# Altium PCB UU006_UUDisplay.PcbDoc
Units mm, origin at the board's own origin, x right, y up, seen from the top; angles counter-clockwise.
Board outline 80 x 50 mm, 2 copper layers (Top Layer, Bottom Layer), stack 1.413 mm thick; 94 components, 55 nets, 292 pads, 59 vias.
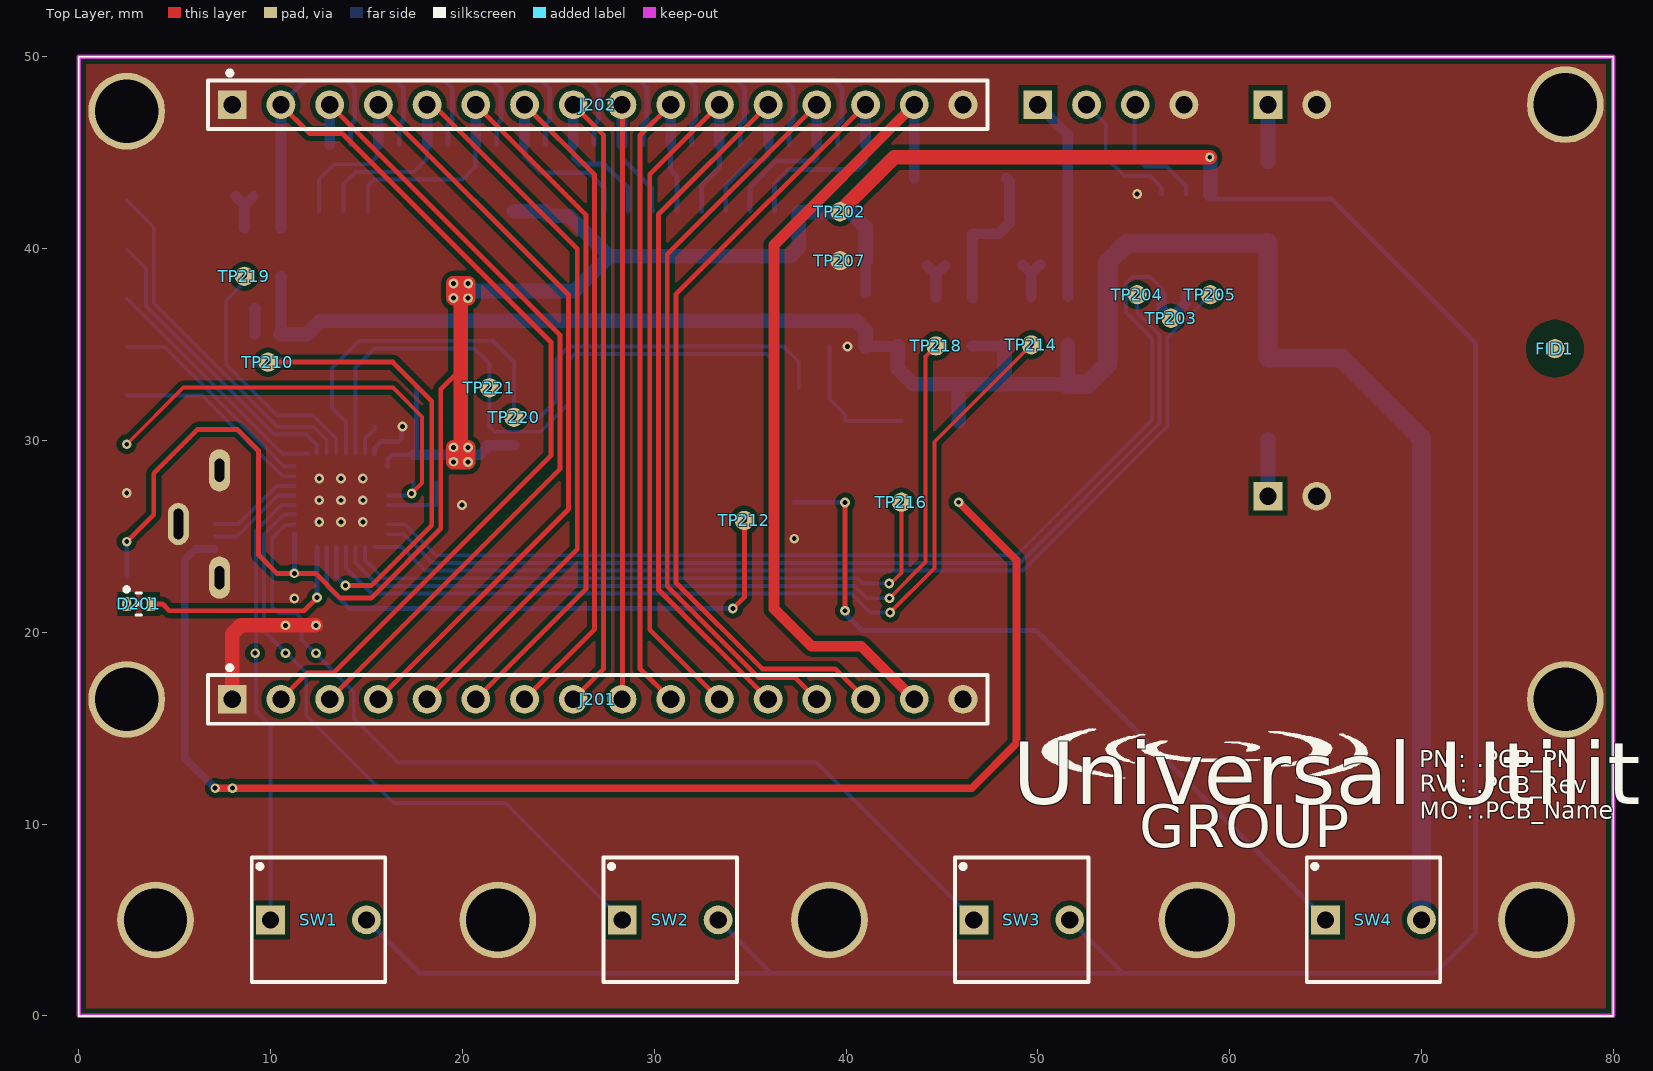
[diagram p0: Top Layer view]
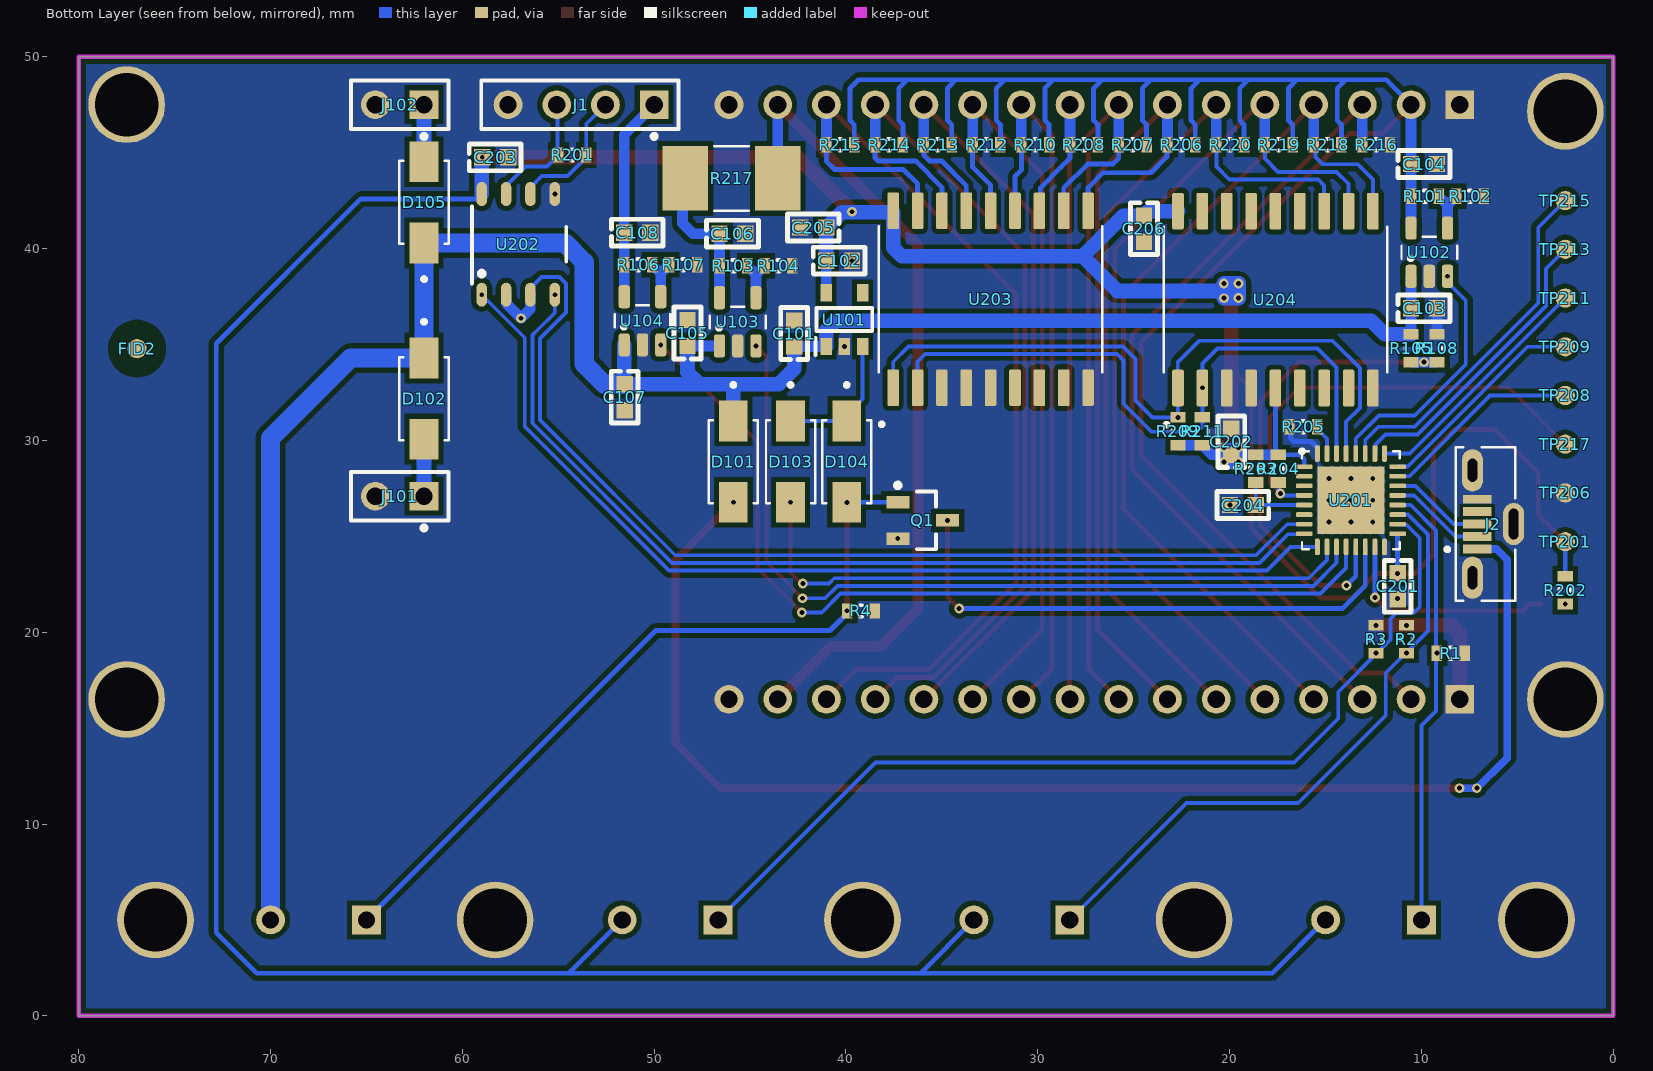
[diagram p1: Bottom Layer view, seen from below]
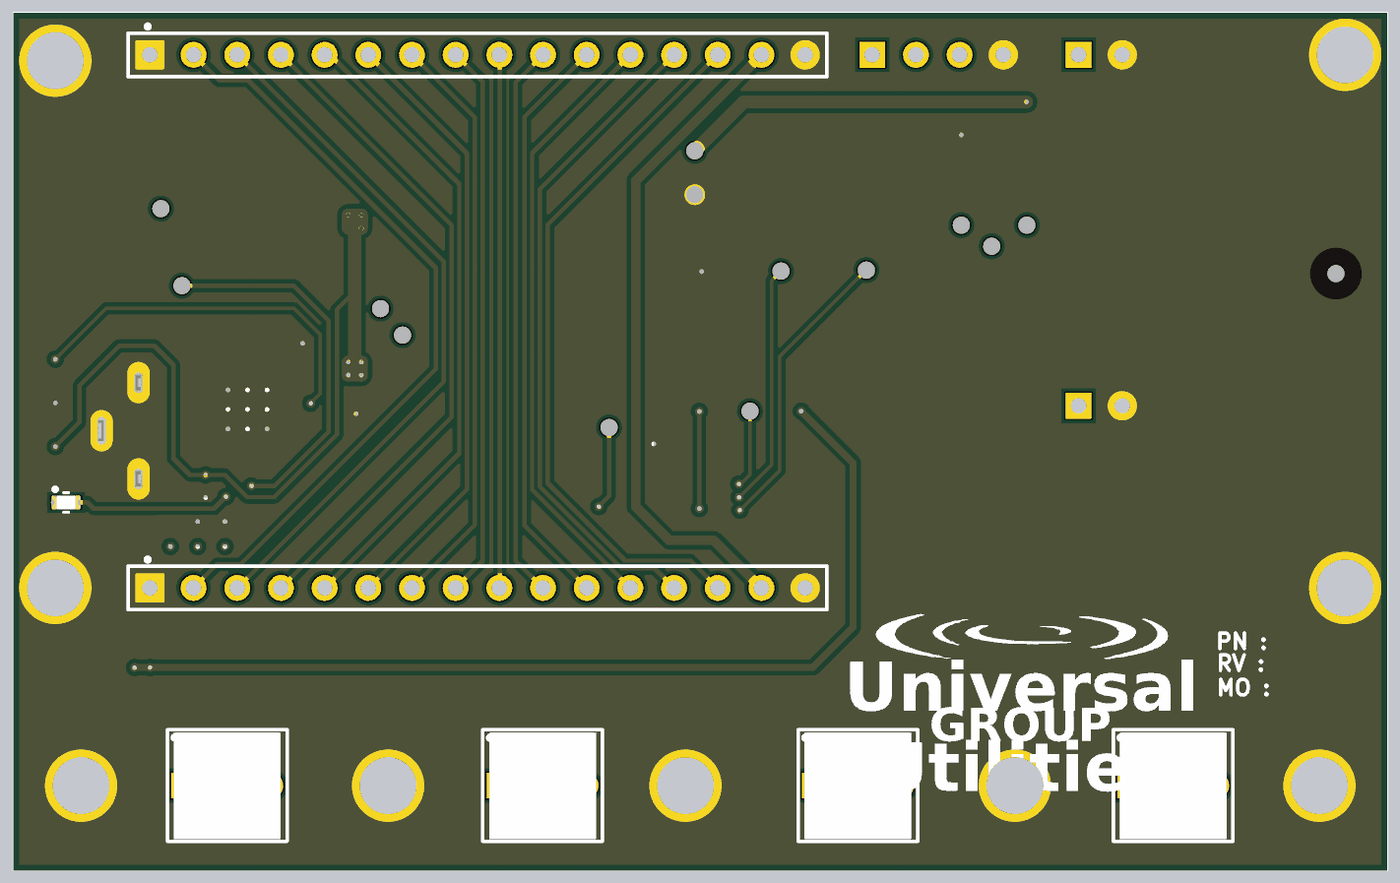
[diagram p2: 3D render of the assembled board from above, using the file's embedded part models]
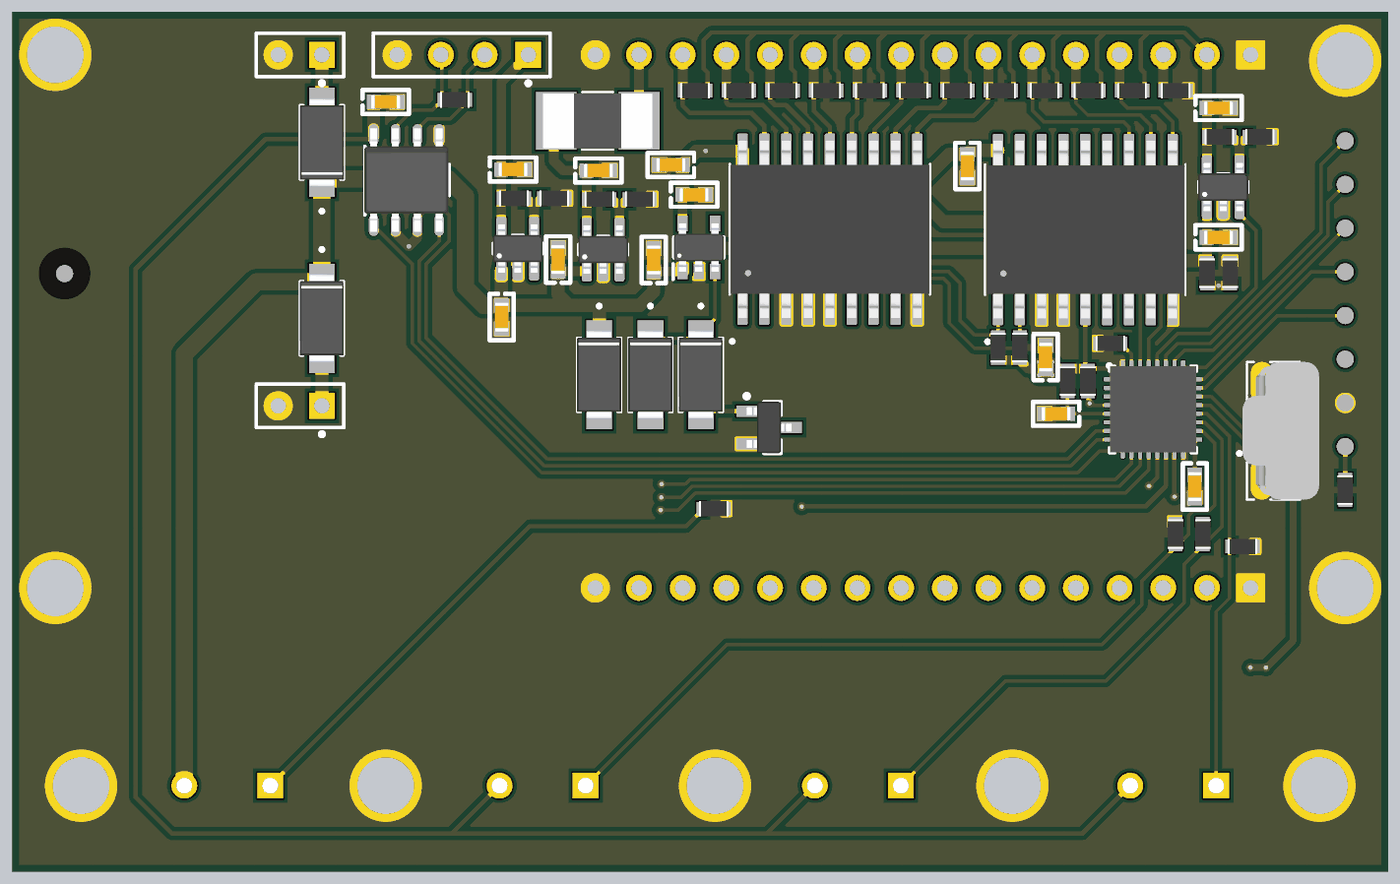
[diagram p3: 3D render of the assembled board from below, using the file's embedded part models]

## Layer stack, top to bottom
Top Solder: solder mask 0.0254, Solder Resist, Dk 3.5
Top Layer: signal copper 0.0356
Dielectric 1: prepreg 0.0711, PP-006, Dk 4.1
Core: core 1.2, FR-4, Dk 3.95
Dielectric 2: prepreg 0.0711, PP-006, Dk 4.1
Bottom Layer: signal copper 0.0356
Bottom Solder: solder mask 0.0254, Solder Resist, Dk 3.5

## Board outline
0,0 0,50 80,50 80,0

## Design rules (kind name [scope] priority, off if disabled: settings)
Clearance Clearance_FID [HasPad('FID*')] p1: gap=1 ignorepadtopadclearanceinfootprint=FALSE except(0: Arc-Hole Track-Hole SMDPad-Hole THPad-Hole Via-Hole Fill-Hole Poly-Hole Region-Hole Text-Hole)
Clearance Clearance_USB [HasPad('J2-*')] p2: gap=0.15 ignorepadtopadclearanceinfootprint=FALSE
Clearance Clearance_Polygon [InNamedPolygon('DGND')] p3: gap=0.254 ignorepadtopadclearanceinfootprint=FALSE
Clearance Clearance_IC [HasPad('C*') or  HasPad('U*') or HasPad('J*')] p4: gap=0.2 ignorepadtopadclearanceinfootprint=FALSE
Clearance Clearance_GND [InNet('DGND')] p5: gap=0.254 ignorepadtopadclearanceinfootprint=FALSE except(0: Arc-Hole Track-Hole SMDPad-Hole THPad-Hole Via-Hole Fill-Hole Poly-Hole Region-Hole Text-Hole)
Clearance [All] p6: gap=0.2 ignorepadtopadclearanceinfootprint=FALSE
DiffPairsRouting DiffPairsRouting_1 [All] p2: maxlimit=0.254 minlimit=0.254 mostfreqgap=0.254 toplayer_minwidth=0.381 toplayer_maxwidth=0.381 toplayer_prefwidth=0.381 bottomlayer_minwidth=0.381 bottomlayer_maxwidth=0.381 bottomlayer_prefwidth=0.381 maxuncoupledlength=12.7
FanoutControl Fanout_LCC [IsLCC] p1: bgadir=Out bgaviamode=Centered fanoutstyle=Auto fanoutdirection=Alternating viagrid=0.025 // Fanout_LCC (Default Rule)
FanoutControl Fanout_SOIC [IsSOIC] p2: bgadir=Out bgaviamode=Centered fanoutstyle=Auto fanoutdirection=Alternating viagrid=0.025 // Fanout_SOIC (Default Rule)
FanoutControl Fanout_BGA [IsBGA] p3: bgadir=Out bgaviamode=Centered fanoutstyle=Auto fanoutdirection=Alternating viagrid=0.025 // Fanout_BGA (Default Rule)
FanoutControl Fanout_Default [All] p4: bgadir=Out bgaviamode=Centered fanoutstyle=Auto fanoutdirection=Alternating viagrid=0.025 // Fanout_Default (Default Rule)
FanoutControl Fanout_Small [(CompPinCount < 5)] p5: bgadir=Out bgaviamode=Centered fanoutstyle=Auto fanoutdirection=OutThenIn viagrid=0.025 // Fanout_Small (Default Rule)
HoleToHoleClearance [All] p1: gap=0.25 allowstackedmicrovias=TRUE
MinimumAnnularRing [All] p1: minimumring=0.05
MinimumSolderMaskSliver [All] p1: minsoldermaskwidth=0.05
PasteMaskExpansion PasteMaskExpansion_1 [All] p2: expansion=0
PolygonConnect [All] p1: connectstyle=Direct reliefconductorwidth=0.254 reliefentries=4 polygonreliefangle="90 Angle" airgapwidth=0.254
RoutingVias [All] p1: holewidth=0.711 width=1.27 viastyle="Through Hole" minholewidth=0.15 minwidth=0.3 maxholewidth=0.711 maxwidth=1.27
SilkToBoardRegionClearance SilkToBoardRegionClearance_3 [All] p2:
SilkToBoardRegionClearance SilkToBoardRegionClearance_2 [All] p3:
SilkToBoardRegionClearance SilkToBoardRegionClearance_1 [All] p4:
SilkToSolderMaskClearance [IsPad] p1: minsilkscreentomaskgap=0.12 clearancetoexposedcopper=TRUE
SolderMaskExpansion [All] p1: expansion=0.102 istentingtop=FALSE
SolderMaskExpansion SolderMaskExpansion_1 [All] p2: expansion=0.102 istentingtop=FALSE
Width [All] p1: maxlimit=5.56 minlimit=0.2 preferedwidth=0.254
22 further rules are at their usual default settings.

## Classes and differential pairs
component class MainControl: 3 C201 C202 C203 C204 C205 C206 D201 J201 J202 R201 R202 R203 R204 R205 R206 R207 R208 R209 R210 R211 R212 R213 R214 R215 R216 R217 R218 R219 R220 TP201 TP202 TP203 TP204 TP205 TP206 TP207 TP208 TP209 TP210 TP211 TP212 TP213 TP214 TP215 TP216 TP217 TP218 TP219 TP220 TP221 U201 U202 U203 U204
component class 0_Overview: FID1 FID2 J1 J2 PCB1 Q1 R1 R2 R3 R4 SW1 SW2 SW3 SW4
component class PowerSystem: C101 C102 C103 C104 C105 C106 C107 C108 D101 D102 D103 D104 D105 J101 J102 R101 R102 R103 R104 R105 R106 R107 R108 U101 U102 U103 U104

## Components (designator, comment, footprint, x,y, rotation, side; value= is the part's Value field where it differs from the comment)
C101 "0.1uF" C_0603 42.704,35.572 r90 bottom
C102 "0.1uF" C_0603 40.358,39.367 r180 bottom
C103 "0.1uF" C_0603 9.865,36.885 r180 bottom
C104 "0.1uF" C_0603 9.865,44.406 r180 bottom
C105 "0.1uF" C_0603 48.265,35.598 r90 bottom
C106 "0.1uF" C_0603 45.92,40.774 r180 bottom
C107 "0.1uF" C_0603 51.54,32.251 r270 bottom
C108 "0.1uF" C_0603 50.885,40.83 r180 bottom
C201 "0.1uF" C_0603 11.241,22.393 r270 bottom
C202 "0.1uF" C_0603 19.911,29.929 r90 bottom
C203 "0.1uF" C_0603 58.29,44.76 r180 bottom
C204 "0.1uF" C_0603 19.31,26.63 r0 bottom
C205 "0.1uF" C_0603 41.708,41.097 r0 bottom
C206 "0.1uF" C_0603 24.468,41.036 r270 bottom
D101 "SK310A R2" DIOM4325X250N 45.874,28.891 r270 bottom
D102 "SK310A R2" DIOM4325X250N 62,32.179 r270 bottom
D103 "SK310A R2" DIOM4325X250N 42.892,28.891 r270 bottom
D104 "SK310A R2" DIOM4325X250N 39.962,28.891 r270 bottom
D105 "SK310A R2" DIOM4325X250N 62,42.409 r90 bottom
D201 "150060VS75000" LED_0VS75000_WRE 3.129,21.47 r0 top
FID1 "FIDUCIAL" FID 76.96,34.78 r0 top value="Non SE"
FID2 "FIDUCIAL" FID 76.96,34.78 r90 bottom value="Non SE"
J1 "*" CON_4P_Header 50,47.5 r0 bottom
J2 "1051330011" MOLEX_105133-0011 7.34,25.64 r90 bottom
J101 "796866-2" CON_2P_Header 62,27.089 r0 bottom
J102 "796866-2" CON_2P_Header 62,47.5 r0 bottom
J201 "*" CON_16P_Header 8,16.5 r0 top
J202 "*" CON_16P_Header 8,47.5 r0 top
Q1 "RK7002BMT116" SOT95P245X110-3M 36,25.826 r180 bottom
R1 "4.7k" R_0603 8.47,18.907 r180 bottom
R2 "4.7k" R_0603 10.78,19.632 r90 bottom
R3 "4.7k" R_0603 12.365,19.632 r90 bottom
R4 "4.7k" R_0603 39.218,21.108 r180 bottom
R101 "4.7k" R_0603 9.815,42.736 r180 bottom
R102 "4.7k" R_0603 7.465,42.736 r180 bottom
R103 "4.7k" R_0603 45.87,39.103 r180 bottom
R104 "4.7k" R_0603 43.52,39.103 r180 bottom
R105 "150k" R_0603 10.54,34.802 r270 bottom
R106 "4.7k" R_0603 50.835,39.16 r180 bottom
R107 "4.7k" R_0603 48.485,39.16 r180 bottom
R108 "150k" R_0603 9.19,34.802 r90 bottom
R201 "120R" R_0603 54.27,44.88 r180 bottom
R202 "220R" R_0603 2.5,22.195 r90 bottom
R203 "0" R_0603 18.635,28.529 r270 bottom
R204 "4.7k" R_0603 17.46,28.529 r90 bottom
R205 "0" R_0603 16.157,30.718 r180 bottom
R206 "4.7k" R_0603 22.515,45.41 r0 bottom
R207 "4.7k" R_0603 25.055,45.41 r0 bottom
R208 "4.7k" R_0603 27.595,45.41 r0 bottom
R209 "4.7k" R_0603 22.691,30.475 r90 bottom
R210 "4.7k" R_0603 30.135,45.41 r0 bottom
R211 "4.7k" R_0603 21.421,30.475 r90 bottom
R212 "4.7k" R_0603 32.675,45.41 r0 bottom
R213 "4.7k" R_0603 35.215,45.41 r0 bottom
R214 "4.7k" R_0603 37.755,45.41 r0 bottom
R215 "4.7k" R_0603 40.295,45.41 r0 bottom
R216 "4.7k" R_0603 12.355,45.41 r0 bottom
R217 "3R3" R_2512 45.965,43.66 r180 bottom
R218 "4.7k" R_0603 14.895,45.41 r0 bottom
R219 "4.7k" R_0603 17.435,45.41 r0 bottom
R220 "4.7k" R_0603 19.975,45.41 r0 bottom
SW1 "TC-0308-X-ROHS" Tactile 10,5 r0 top
SW2 "TC-0308-X-ROHS" Tactile 28.333,5 r0 top
SW3 "TC-0308-X-ROHS" Tactile 46.667,5 r0 top
SW4 "TC-0308-X-ROHS" Tactile 65,5 r0 top
TP201 "" TP_Testpoint 2.5,24.72 r270 bottom
TP202 "" TP_Testpoint 39.683,41.92 r90 top
TP203 "" TP_Testpoint 56.946,36.367 r270 top
TP204 "" TP_Testpoint 55.18,37.594 r270 top
TP205 "" TP_Testpoint 58.99,37.594 r270 top
TP206 "" TP_Testpoint 2.5,27.26 r270 bottom
TP207 "" TP_Testpoint 39.683,39.367 r90 top
TP208 "" TP_Testpoint 2.5,32.34 r180 bottom
TP209 "" TP_Testpoint 2.5,34.88 r180 bottom
TP210 "" TP_Testpoint 9.865,34.077 r270 top
TP211 "" TP_Testpoint 2.5,37.42 r180 bottom
TP212 "" TP_Testpoint 34.7,25.826 r270 top
TP213 "" TP_Testpoint 2.5,39.96 r270 bottom
TP214 "" TP_Testpoint 49.66,34.98 r270 top
TP215 "" TP_Testpoint 2.5,42.5 r180 bottom
TP216 "" TP_Testpoint 42.892,26.776 r270 top
TP217 "" TP_Testpoint 2.5,29.8 r180 bottom
TP218 "" TP_Testpoint 44.695,34.923 r270 top
TP219 "" TP_Testpoint 8.64,38.555 r270 top
TP220 "" TP_Testpoint 22.691,31.2 r270 top
TP221 "" TP_Testpoint 21.41,32.741 r270 top
U101 "BU33SD5WG-TR" SOT95P280X125-5N 40.083,36.297 r90 bottom
U102 "ZTP7001-00" SOT95P280X145-5N 9.59,39.81 r90 bottom
U103 "ZTP7001-00" SOT95P280X145-5N 45.645,36.178 r90 bottom
U104 "ZTP7001-00" SOT95P280X145-5N 50.61,36.235 r90 bottom
U201 "STM32L432KCU6" QFN50P500X500X60-33N 13.676,26.88 r180 bottom
U202 "SN65HVD11DR" D0008A_L 57.085,40.219 r90 bottom
U203 "MCP23008-E/SO" SOIC127P1030X265-18N 32.459,37.358 r90 bottom
U204 "MCP23008-E/SO" SOIC127P1030X265-18N 17.611,37.339 r90 bottom

## Footprints (in the part's own frame and the unit in brackets; to place one, negate y for a bottom-side part, rotate by r counter-clockwise, add the part's x,y. Pads: shape width x height; smd on the part's side, far side on the other; paste and mask are expansions set on the pad)
C_0603 [mm] "Chip Capacitor, 2-Leads, Body 1.60x0.75mm, IPC Medium Density"
  rect 0.85x0.85 smd mask+0.03: 1(-0.675,0) 2(0.675,0)
  silkscreen extent -1.35,-0.7 1.35,0.7, body extent -0.85,-0.4 0.85,0.4, height 0.8
CON_2P_Header [mm] "Connector; Header; 2 Position"
  rect 1.5x1.5 hole 0.9: 1(0,0)
  round 1.5 hole 0.9: 2(2.54,0)
  silkscreen extent -1.27,-1.27 3.81,1.76
CON_4P_Header [mm] "Connector; Header 4 Position"
  rect 1.5x1.5 hole 0.9: 1(0,0)
  round 1.5 hole 0.9: 2(2.54,0) 3(5.08,0) 4(7.62,0)
  silkscreen extent -1.27,-1.27 9.02,1.76
CON_16P_Header [mm] "Connector; Header 16 Position"
  rect 1.5x1.5 hole 0.9: 1(0,0)
  round 1.5 hole 0.9: 2(2.54,0) 3(5.08,0) 4(7.62,0) 5(10.16,0) 6(12.7,0) 7(15.24,0) 8(17.78,0) 9(20.32,0) 10(22.86,0) 11(25.4,0) 12(27.94,0) 13(30.48,0) 14(33.02,0) 15(35.56,0) 16(38.1,0)
  silkscreen extent -1.27,-1.27 39.37,1.76
D0008A_L [mm]
  oval 1.25x0.55 smd mask+0.05: 1(-2.625,1.905) 2(-2.625,0.635) 3(-2.625,-0.635) 4(-2.625,-1.905) 5(2.625,-1.905) 6(2.625,-0.635) 7(2.625,0.635) 8(2.625,1.905)
  silkscreen extent -2.03,-2.5 1.97,2.41, body extent -3.01,-2.45 3.01,2.45, height 1.63
DIOM4325X250N [mm]
  rect 2.12x1.5 smd: 1(-2.115,0) 2(2.115,0)
  silkscreen extent -4.1,-1.28 2.16,1.28, body extent -2.58,-1.29 2.56,1.27, height 2.5
FID [mm]
  round 1 smd mask+1: ""(0,0)
LED_0VS75000_WRE [mil]
  rect 17.5x28 smd: 1(-24.75,0) 2(24.75,0)
  silkscreen extent -29,-22 6,34, body extent -31,-16 32,16, height 28
MOLEX_105133-0011 [mm]
  rect 0.45x1.5 smd mask+0.05: 1(-1.3,-0.25) 2(-0.65,-0.25) 3(0,-0.25) 4(0.65,-0.25) 5(1.3,-0.25)
  oval 2.2x1.1 hole 0.5 slot 1.2 at 0 deg: S1(-2.8,0) S2(2.8,0)
  oval 2.2x1.1 hole 0.5 slot 1.6 at 0 deg: S3(0,-2.15)
  silkscreen extent -4,-2.22 4,1.41, body extent -4.03,-3.32 4,1.13, height 7.53
QFN50P500X500X60-33N [mm]
  rrect54% 0.86x0.25 smd mask+0.05: 1(-2.435,1.75) 2(-2.435,1.25) 3(-2.435,0.75) 4(-2.435,0.25) 5(-2.435,-0.25) 6(-2.435,-0.75) 7(-2.435,-1.25) 8(-2.435,-1.75) 17(2.435,-1.75) 18(2.435,-1.25) 19(2.435,-0.75) 20(2.435,-0.25) 21(2.435,0.25) 22(2.435,0.75) 23(2.435,1.25) 24(2.435,1.75)
  rrect54% 0.25x0.86 smd mask+0.05: 9(-1.75,-2.435) 10(-1.25,-2.435) 11(-0.75,-2.435) 12(-0.25,-2.435) 13(0.25,-2.435) 14(0.75,-2.435) 15(1.25,-2.435) 16(1.75,-2.435) 25(1.75,2.435) 26(1.25,2.435) 27(0.75,2.435) 28(0.25,2.435) 29(-0.25,2.435) 30(-0.75,2.435) 31(-1.25,2.435) 32(-1.75,2.435)
  rect 3.5x3.5 smd paste-3 mask+0.05: 33(0,0)
  silkscreen extent -2.6,-2.55 2.55,2.6, body extent -2.5,-2.5 2.5,2.5, height 0.6
R_0603 [mm] "Chip Resistor, 2-Leads, Body 1.60x0.80mm, IPC High Density"
  rect 0.55x0.8 smd: 1(-0.725,0) 2(0.725,0)
  silkscreen extent -0.05,-0.3 0.05,0.3, body extent -0.85,-0.45 0.85,0.45, height 0.45
R_2512 [mm] "RES SMD 3.3 OHM 5% 3W 2512"
  rect 2.37x3.37 smd: 1(-2.405,0) 2(2.405,0)
  silkscreen extent -0.9,-1.68 0.9,1.68, body extent -3.17,-1.6 3.18,1.6, height 1.2
SOIC127P1030X265-18N [mm]
  rrect25% 1.91x0.6 smd: 1(-4.61,5.08) 2(-4.61,3.81) 3(-4.61,2.54) 4(-4.61,1.27) 5(-4.61,0) 6(-4.61,-1.27) 7(-4.61,-2.54) 8(-4.61,-3.81) 9(-4.61,-5.08) 10(4.61,-5.08) 11(4.61,-3.81) 12(4.61,-2.54) 13(4.61,-1.27) 14(4.61,0) 15(4.61,1.27) 16(4.61,2.54) 17(4.61,3.81) 18(4.61,5.08)
  silkscreen extent -6.62,-5.82 3.8,5.82, body extent -5.16,-5.78 5.16,5.78, height 2.64
SOT95P245X110-3M [mm] "SOT23, 3-Leads, Body 2.90x2.45mm, Pitch 0.95mm, IPC Low Density"
  rect 1.2x0.65 smd: 1(-1.3,0.95) 2(-1.3,-0.95) 3(1.3,0)
  silkscreen extent -1.43,-1.5 0.7,1.95, body extent -1.3,-1.5 1.3,1.5, height 1.1
SOT95P280X125-5N [mm]
  rect 0.9x0.6 smd: 1(-1.4,0.95) 2(-1.4,0) 3(-1.4,-0.95) 4(1.4,-0.95) 5(1.4,0.95)
  silkscreen extent -1.85,-1.45 0.6,1.5, body extent -1.4,-1.45 1.4,1.45, height 1.25
SOT95P280X145-5N [mm]
  rrect50% 1.21x0.59 smd: 1(-1.255,0.95) 2(-1.255,0) 3(-1.255,-0.95) 4(1.255,-0.95) 5(1.255,0.95)
  silkscreen extent -0.41,-1.45 0.8,1.45, body extent -1.4,-1.45 1.4,1.45, height 1.45
Tactile [mm] "Tactile SW"
  rect 1.5x1.5 hole 0.9: 1(0,0)
  round 1.5 hole 0.9: 2(5,0)
  silkscreen extent -0.98,-3.23 5.98,3.25, body extent -0.6,-3.1 5.6,3.1, height 9.5
TP_Testpoint [mm] "Size 1 mm"
  round 1 smd: 1(0,0)

## Part data
C101 C102 C103 C104 C105 C106 C107 C108 C201 C202 C203 C204 C205 C206: library part C_Capacitor, "CAP CER 0.1UF 50V X7R 0603", Manufacturer=KEMET, PartNumber=C0603C104K5RACTU, Value2=50V, PackageReference=0603, PartID=399-5089-1-ND
D101 D102 D103 D104 D105: library part D_PW_SK310A, "DIODE SCHOTTKY 100V 3A DO214AC", Manufacturer="Taiwan Semiconductor Corporation", PartID=0029-0147-1, PartNumber="SK310A R2"
D201: library part D_LED_150060BS75000, "LED BLUE CLEAR 0603 SMD", Manufacturer="Wurth Electronics", PackageReference=0603, PartID=732-4980-1-ND, PartNumber=150060VS75000
FID1 FID2: library part FID_FIDUCIAL, "Fiducial", Manufacturer=mindek30@gmail.com, PartNumber=UU006_A0, Value2="Non SE", PackageReference="Non SE", PartID=A0, Value3="Non SE"
J1: library part CON_4P_Heder, "Connector 4 position"
J2: library part CON_USBMiniB_TH, "USB 2.0 1 Brick nogging 5 Female Micro-B SMD USB Connectors ROHS", Manufacturer=Molex, PartID=C586226, PartNumber=1051330011
J101 J102: library part CON_2P_Heder, "Connector 2 position", Manufacturer="TE Connectivity AMP Connectors", PackageReference="TERM BLOCK", PartID=A98302-ND, PartNumber=796866-2
J201 J202: library part CON_16P_Heder, "Connector 6 position"
Q1: library part Q_NMOS_RK7002BMT116, "MOSFET N-Channel 60V/250mA,0.2W", Manufacturer=ROHM, PackageReference=SOT23, PartID=0176-0358-6, PartNumber=RK7002BMT116
R1 R2 R3 R4 R101 R102 R103 R104 R106 R107 R204 R206 R207 R208 R209 R210 R211 R212 R213 R214 R215 R216 R218 R219 R220: library part R_Resister, "RES 4.7K OHM 5% 1/10W 0603", Manufacturer="Vishay Dale", PartNumber=CRCW06034K70JNEBC, Value2=0.1W, PackageReference=0603, PartID=541-CRCW06034K70JNEBCCT-ND
R105 R108: library part R_Resister, "RES SMD 150K OHM 1% 1/10W 0603", Manufacturer="Vishay Dale", PartNumber=CRCW0603150KFKEAC, Value2=0.1W, PackageReference=0603, PartID=541-4034-1-ND
R201: library part R_Resister, "RES SMD 120 OHM 1% 1/3W 0603", Manufacturer="Vishay Dale", PartNumber=CRCW0603120RFKEAHP, Value2=0.333W, PackageReference=0603, PartID=541-120SCT-ND
R202: library part R_Resister, "RES SMD 220 OHM 1% 1/10W 0603", Manufacturer="Vishay Dale", PartNumber=CRCW0603220RFKEAC, Value2=0.1W, PackageReference=0603, PartID=541-4047-1-ND
R203 R205: library part R_Resister, "RES SMD 0 OHM JUMP 1/10W 0603", Manufacturer="Vishay Dale", PartNumber=CRCW06030000Z0EBC, Value2=0.1W, PackageReference=0603, PartID=541-4013-1-ND
R217: library part R_Resister, "RES SMD 3.3 OHM 5% 3W 2512", Manufacturer=Vishay, PartNumber=35223R3JT, Value2=3W, Value3=5%, PackageReference=2512, PartID=A121247CT-ND
SW1 SW2 SW3 SW4: library part SW_TAC_TH, "SWITCH TACTILE SPST-NO 0.05A 50V", Manufacturer="WEALTH METAL", PartID=0171-0064-8, PartNumber=TC-0308-X-ROHS
TP201 TP202 TP203 TP204 TP205 TP206 TP207 TP208 TP209 TP210 TP211 TP212 TP213 TP214 TP215 TP216 TP217 TP218 TP219 TP220 TP221: library part TP_TestPoint, "TestPoint"
U101: library part IC_LDO_BU33SD5WG-TR, "IC REG LINEAR 3.3V 500MA 5SSOP", Manufacturer="Rohm Semiconductor", PackageReference=SOT-753, PartID=0176-0571-3, PartNumber=BU33SD5WG-TR
U102 U103 U104: library part IC_LDO_ZTP7001, "70dB@(1kHz) 600mA 65μA 420mV@600mA -40℃~+125℃@(Tj) Adjustable Positive 70uVrms 1 6V Overcurrent Protection，Enable, Thermal Protection SOT-23-5L Linear Voltage Regulators (LDO) ROHS", Manufacturer=ZILLTEK, PackageReference=SOT-23-5, PartID=C481271, PartNumber=ZTP7001-00
U201: library part IC_MCU_STM32L432, "IC MCU 32BIT 256KB FLSH 32UFQFPN", Manufacturer=STMicroelectronics, PartID=497-16578-ND, PartNumber=STM32L432KCU6
U202: library part IC_TRAN_THVD1505DR, "IC TRANSCEIVER HALF 1/1 8SOIC", Manufacturer="Texas Instruments", PackageReference=8SOIC, PartID=0086-0766-1, PartNumber=SN65HVD11DR, Value3=SN65HVD11DR
U203 U204: library part IC_INTERF_MCP23008-E/SO, "IC I/O EXPANDER I2C 8B 18SOIC", Manufacturer="Microchip Technology", PackageReference=18-SOIC, PartID=0035-0598-4, PartNumber=MCP23008-E/SO

## Free pads (board coordinates)
  round 4 hole 3.3: ""(2.5,16.5) ""(2.5,47.16) ""(4,5) ""(21.85,5) ""(39.14,5) ""(58.29,5) ""(76,5) ""(77.5,16.5) ""(77.5,47.5)

## Via types
v1: diameter 0.508, hole 0.254, Top Layer to Bottom Layer, tented both sides, 59 vias

## Nets (pads, with @x,y where several pads share a name; then routed paths per layer and width w, separated by ;. In a path a pad name is that pad's centre, name@x,y a point inside that pad or via, vN(x,y) a via of type N, cw(c..) or ccw(c..) an arc to the next point about the centre after c; other vN are vias at no path point)
+3.3VD: C102.1 C201.1 C202.1 C203.1 C205.1 C206.1 R202.2 R203.1 R204.2 R209.1 R211.1 SW1.2 SW2.2 SW3.2 TP201.1 TP202.1 U101.5 U201.1 U201.17 U202.8 U203.18 U204.5 U204.18 | length 240.8
  Top Layer w0.254: v1(2.5,24.72) 3.91,26.13 3.91,28.28 6.2,30.57 8.27,30.57 9.37,29.47 9.37,24.03 10.332,23.068 v1(11.241,23.068) 12.352,23.068 13.64,21.78 15.242,21.78 18.87,25.408 18.87,32.673 19.916,33.719
  Top Layer w0.762: v1(19.532,28.88) v1(19.532,29.638) 19.916,29.638 19.916,33.719 19.916,37.421 ; v1@19.537,28.875 v1@20.295,28.875 ; v1(19.537,37.426) 19.537,37.8 v1(19.537,38.184) 19.921,38.184 ; v1@19.542,37.421 19.916,37.421 ; 19.921,38.179 19.921,38.184 ; v1(20.29,28.87) v1@20.295,28.875 ; v1(20.295,29.633) v1@20.295,28.875 ; v1(20.295,37.416) v1@20.3,37.421 ; v1@20.295,38.184 19.921,38.184 ; v1(20.3,38.179) v1@20.3,37.421 ; v1(39.683,41.92) 42.523,44.76 v1(58.965,44.76) ; 19.916,37.421 v1@20.3,37.421
  Bottom Layer w0.254: R202.2 v1(2.5,24.72) ; v1(11.241,23.068) U201.17 ; SW1.2 17.78,2.22 36.113,2.22 ; U201.1 16.111,29.011 16.354,29.254 R204.2 ; R204.2@17.611,29.254 U204.5 ; SW2.2 36.113,2.22 ; U203.18@37.539,41.903 U203.18 ; SW3.2 54.447,2.22 ; U202.8 58.99,42.727 59.127,42.59 65.29,42.59 72.83,35.05 72.83,4.33 70.72,2.22 54.447,2.22 ; 36.113,2.22 54.447,2.22
  Bottom Layer w0.556: R204.2 17.611,29.254 R203.1 C202.1@19.527,29.254 ; C202.1@20.295,29.254 20.925,29.254 21.299,29.628 21.299,29.747 21.302,29.75 R211.1 R209.1 ; U101.5 C102.1
  Bottom Layer w0.762: C202.1@19.507,29.517 C202.1@20.265,29.517 ; C202.1@19.532,28.87 v1(20.29,28.87) ; v1@19.532,37.421 19.532,38.179 v1@20.29,38.179 ; v1@19.537,37.416 v1(20.295,37.416) 20.295,37.79 ; 19.8,37.79 20.295,37.79 ; v1@20.295,38.174 20.295,37.79 ; U204.18 24.231,41.949 C206.1 25.539,41.711 27.66,39.59 ; C102.1 C205.1 40.227,41.903 37.539,41.903 37.539,40.036 37.093,39.59 27.66,39.59 ; C203.1@58.978,44.76 58.988,44.716 U202.8@58.988,42.846 ; 20.295,37.79 25.86,37.79 27.66,39.59
+5VBK: C106.1 R103.1 R217.1 U103.5 | length 7.9
  Bottom Layer w0.556: U103.5 R103.1 C106.1 47.974,40.774 48.52,41.32 48.52,43.51 R217.1
+5VLCD: C104.1 J201.2 J202.2 R101.1 R206.1 R207.1 R208.1 R210.1 R212.1 R213.1 R214.1 R215.1 R218.1 R219.1 R220.1 U102.5 | length 120.5
  Top Layer w0.254: J201.2 11.92,17.88 13.29,17.88 24.626,29.216 24.626,35.104 13.73,46 12.04,46 J202.2
  Bottom Layer w0.254: J202.2 11.84,48.8 13.95,48.8 ; R218.1 14.17,46.46 14.39,46.68 14.39,48.36 13.95,48.8 ; R219.1 16.71,46.46 16.93,46.68 16.93,48.36 16.49,48.8 ; R220.1 19.25,46.46 19.47,46.68 19.47,48.36 19.03,48.8 ; R206.1 21.79,46.46 22.01,46.68 22.01,48.36 21.57,48.8 ; R207.1 24.33,46.46 24.55,46.68 24.55,48.36 24.11,48.8 ; R208.1 26.87,46.46 27.09,46.68 27.09,48.36 26.65,48.8 ; R210.1 29.41,46.46 29.63,46.68 29.63,48.36 29.19,48.8 ; R212.1 31.95,46.46 32.17,46.68 32.17,48.36 31.73,48.8 ; R213.1 34.49,46.46 34.71,46.68 34.71,48.36 34.27,48.8 ; R214.1 37.03,46.46 37.25,46.68 37.25,48.36 36.81,48.8 ; R215.1 39.57,46.46 39.79,46.68 39.79,48.36 39.35,48.8 36.81,48.8 ; 13.95,48.8 16.49,48.8 ; 16.49,48.8 19.03,48.8 ; 19.03,48.8 21.57,48.8 ; 21.57,48.8 24.11,48.8 ; 24.11,48.8 26.65,48.8 ; 26.65,48.8 29.19,48.8 ; 29.19,48.8 31.73,48.8 ; 31.73,48.8 34.27,48.8 ; 34.27,48.8 36.81,48.8
  Bottom Layer w0.556: U102.5 R101.1 C104.1 J202.2
+5VSensor: C108.1 J1.1 R106.1 U104.5 | length 10.7
  Bottom Layer w0.556: J1.1 51.56,45.94 C108.1 R106.1 U104.5
+MVD: C101.1 C103.1 C105.1 C107.1 D101.1 D102.1 D105.1 R105.1 SW4.2 U101.1 U102.1 U103.1 U104.1 | length 112.2
  Bottom Layer w0.556: R105.1 C103.1 U102.1 ; U101.1 C101.1 ; U103.1 C105.1
  Bottom Layer w0.762: R105.1 11.907,35.527 12.62,36.24 40.54,36.24 41.033,35.747 U101.1 ; C101.1 42.704,33.736 43.514,32.926 45.874,32.926 ; D101.1 45.874,32.926 ; 47.66,32.96 48.265,33.565 C105.1 ; C107.1 45.874,32.926 ; C107.1@51.56,32.926 U104.1
  Bottom Layer w1: C107.1 51.56,32.926 52.596,32.926 53.65,33.98 53.65,39.29 54.654,40.294 D105.1 D102.1 65.816,34.294 70,30.11 SW4.2
+VCharge: D101.2 J2.1 | length 71.8
  Top Layer w0.4: v1(7.11,11.87) 46.55,11.87 48.89,14.21 48.89,23.76 v1(45.874,26.776)
  Bottom Layer w0.4: J2.1 6.09,24.34 5.53,23.78 5.53,13.44 v1@7.105,11.865 ; v1(7.11,11.87) v1(8.01,11.87)
ADC1_IN12: R105.2 R108.1 TP210.1 U201.13 | length 25.2
  Top Layer w0.254: v1(9.865,34.077) 16.373,34.077 18.4,32.05 18.4,25.58 15.25,22.43 v1(13.91,22.43)
  Bottom Layer w0.254: U201.13 13.426,22.914 v1(13.91,22.43)
  Bottom Layer w0.556: R108.1 v1(9.865,34.077) R105.2
DGND: C101.2 C102.2 C103.2 C104.2 C105.2 C106.2 C107.2 C108.2 C201.2 C202.2 C203.2 C204.2 C205.2 C206.2 J1.4 J2.5 J2.S1 J2.S2 J2.S3 J101.2 J102.2 J201.1 J201.16 J202.1 J202.16 pad. Q1.2 R1.2 R2.2 R3.2 R4.2 R102.2 R104.2 R107.2 R108.2 R205.1 R216.1 TP206.1 TP207.1 U101.2 U102.2 U103.2 U104.2 U201.16 U201.32 U201.33 U202.5 U203.3 U203.4 U203.5 U203.9 U204.3 U204.4 U204.9 | length 11.9
  Top Layer w0.762: J201.1 8,19.911 8.446,20.357 9.195,20.357 v1(10.78,20.357) v1(12.365,20.357)
  Bottom Layer w0.254: U201.32 15.426,29.616 15.748,29.937 16.657,29.937 16.82,30.1 16.82,30.656 v1(16.882,30.718)
  Bottom Layer w0.556: R108.2 C103.2
  other v1: 11.241,21.754 37.3,24.876 12.54,25.744 13.676,25.744 14.812,25.744 19.985,26.63 12.54,26.88 13.676,26.88 14.812,26.88 2.5,27.26 12.54,28.016 13.676,28.016 14.812,28.016 40.083,34.897 39.683,39.367 55.18,42.844
I2C1_SCA: R211.2 TP221.1 U201.30 U203.2 U204.2 | length 35
  Bottom Layer w0.2: U201.30 14.426,33.806 15.41,34.79 20.63,34.79 21.41,34.01 v1(21.41,32.741) U204.2 R211.2 21.421,30.719 21.69,30.45 24.07,30.45 25.53,31.91 25.53,34.17 25.86,34.5 35.87,34.5 36.269,34.101 U203.2
I2C1_SCL: R209.2 TP220.1 U201.29 U203.1 U204.1 | length 37.5
  Bottom Layer w0.2: U201.29 13.926,30.969 13.201,31.694 13.201,33.765 14.627,35.19 21.603,35.19 22.7,34.093 22.7,32.738 U204.1 v1(22.691,31.2) 24.02,31.2 24.9,32.08 24.9,34.24 25.56,34.9 36.74,34.9 37.539,34.101 U203.1
LCD_A: J201.15 J202.15 R217.2 | length 42.4
  Top Layer w0.556: J201.15 40.79,19.27 38.2,19.27 36.25,21.22 36.25,40.19 J202.15
  Bottom Layer w0.556: R217.2 J202.15
LCD_BR: J201.3 J202.3 R216.2 | length 43
  Top Layer w0.254: J201.3 25.08,28.5 25.08,35.5 J202.3
  Bottom Layer w0.556: R216.2 J202.3
LCD_CMD: J201.4 J202.4 R218.2 U204.10 | length 47.1
  Top Layer w0.254: J201.4 25.534,26.414 25.534,37.586 J202.4
  Bottom Layer w0.2: U204.10 12.531,43.601 13.33,44.4 15.15,44.4 15.53,44.78 15.53,45.32 R218.2
  Bottom Layer w0.556: R218.2 J202.4
LCD_D0: J201.7 J202.7 R206.2 U203.10 | length 42.7
  Top Layer w0.254: J201.7 26.896,20.156 26.896,43.844 J202.7
  Bottom Layer w0.254: R206.2 23.272,45.378 23.272,44.778 24.1,43.95 26.61,43.95 27.379,43.181 U203.10
  Bottom Layer w0.556: R206.2 J202.7
LCD_D1: J201.8 J202.8 R207.2 U203.11 | length 39.9
  Top Layer w0.254: J201.8@25.8,16.73 26.01,16.73 27.35,18.07 27.35,45.93 25.8,47.48 J202.8@25.8,47.73
  Bottom Layer w0.254: R207.2 25.78,44.71 26.086,44.404 27.406,44.404 28.649,43.161 U203.11
  Bottom Layer w0.556: R207.2 J202.8
LCD_D2: J201.9 J202.9 R208.2 U203.12 | length 37.2
  Top Layer w0.254: J201.9@28.34,16.73 J202.9@28.34,47.73
  Bottom Layer w0.254: R208.2 28.32,44.71 28.77,44.26 29.875,43.155 29.875,42.012 U203.12
  Bottom Layer w0.556: R208.2 J202.9
LCD_D3: J201.10 J202.10 R210.2 U203.13 | length 38
  Top Layer w0.254: J201.10 29.26,18.1 29.26,45.9 J202.10
  Bottom Layer w0.254: R210.2 30.86,44.09 31.189,43.761 U203.13
  Bottom Layer w0.556: R210.2 J202.10
LCD_D4: J201.11 J202.11 R212.2 U203.14 | length 39.9
  Top Layer w0.254: J201.11 29.77,20.13 29.77,43.87 J202.11
  Bottom Layer w0.254: U203.14 32.459,43.309 33.4,44.25 R212.2
  Bottom Layer w0.556: R212.2 J202.11
LCD_D5: J201.12 J202.12 R213.2 U203.15 | length 42.6
  Top Layer w0.254: J201.12 30.224,22.216 30.224,41.784 J202.12
  Bottom Layer w0.254: U203.15 33.729,43.279 35.02,44.57 35.65,44.57 35.94,44.86 R213.2
  Bottom Layer w0.556: R213.2 J202.12
LCD_D6: J201.13 J202.13 R214.2 U203.16 | length 46.7
  Top Layer w0.254: J201.13 37.346,17.634 35.448,17.634 30.678,22.404 30.678,39.698 J202.13
  Bottom Layer w0.254: U203.16 34.999,43.199 36.374,44.574 38.331,44.574 38.48,44.723 R214.2
  Bottom Layer w0.556: R214.2 J202.13
LCD_D7: J201.14 J202.14 R215.2 U203.17 | length 51
  Top Layer w0.254: J201.14 39.432,18.088 35.637,18.088 31.132,22.592 31.132,37.612 J202.14
  Bottom Layer w0.254: U203.17 36.269,43.369 37.02,44.12 40.59,44.12 41.02,44.55 R215.2
  Bottom Layer w0.556: R215.2 J202.14
LCD_EN: J201.6 J202.6 R220.2 U204.12 | length 46.4
  Top Layer w0.254: J201.6 26.442,22.242 26.442,41.758 J202.6
  Bottom Layer w0.2: U204.12 15.071,43.291 15.38,43.6 20.02,43.6 20.69,44.27 20.69,45.4 R220.2
  Bottom Layer w0.556: R220.2 J202.6
LCD_RW: J201.5 J202.5 R219.2 U204.11 | length 46.8
  Top Layer w0.254: J201.5 25.988,24.328 25.988,39.992 18.48,47.5 J202.5
  Bottom Layer w0.2: U204.11 13.801,43.381 14.42,44 17.47,44 18.16,44.69 R219.2
  Bottom Layer w0.556: R219.2 J202.5
MCU_BOOT: R205.2 U201.31 | length 1.6
  Bottom Layer w0.2: U201.31 14.926,30.087 15.432,30.593 R205.2
MCU_RESET: R204.1 TP217.1 U201.4 | length 23.4
  Top Layer w0.2: v1(2.5,29.8) 5.45,32.75 16.38,32.75 17.9,31.23 17.9,27.78 v1(17.355,27.235)
  Bottom Layer w0.2: U201.4 17.25,27.13 v1(17.355,27.235) 17.46,27.34 R204.1
NetD102_2: D102.2 J101.1 | length 3
  Bottom Layer w0.762: J101.1 D102.2
NetD103_1: D103.1 D104.1 U101.3 | length 7.2
  Bottom Layer w0.2: U101.3 39.133,32.145 39.962,31.316 D104.1 D103.1
NetD105_2: D105.2 J102.1 | length 3
  Bottom Layer w0.762: D105.2 J102.1
NetD201_1: D201.1 R202.1
  other v1: 2.5,21.47
NetD201_2: D201.2 U201.15 | length 11.7
  Top Layer w0.254: D201.2 4.37,21.47 4.721,21.119 11.741,21.119 v1(12.426,21.804)
  Bottom Layer w0.254: v1(12.426,21.804) U201.15 U201.15@12.428,24.443
NetR101_2: R101.2 R102.1 U102.4 | length 2.5
  Bottom Layer w0.556: R102.1 8.64,42.286 ; U102.4 8.64,42.286 ; R101.2 8.64,42.286
NetR103_2: R103.2 R104.1 U103.4 | length 2.5
  Bottom Layer w0.556: R104.1 44.695,38.653 ; U103.4 44.695,38.653 ; R103.2 44.695,38.653
NetR106_2: R106.2 R107.1 U104.4 | length 2.5
  Bottom Layer w0.556: R107.1 49.66,38.71 ; U104.4 49.66,38.71 ; R106.2 49.66,38.71
Power_BUT: D104.2 Q1.1 R4.1 SW4.1 | length 40.1
  Top Layer w0.254: v1(39.95,21.115) v1(39.95,26.76)
  Bottom Layer w0.254: Q1.1 D104.2 ; v1(39.95,21.115) 39.95,20.976 40.836,20.09 49.91,20.09 SW4.1
PW_EN_BK: TP218.1 U103.3 U201.11 | length 43.6
  Top Layer w0.2: v1(42.263,21.77) 44.15,23.656 44.15,34.378 v1(44.695,34.923)
  Bottom Layer w0.2: U201.11 14.426,23.618 15.634,22.41 40.446,22.41 41.086,21.77 v1(42.263,21.77)
PW_EN_LCD: TP219.1 U102.3 U201.28 | length 13.1
  Bottom Layer w0.2: v1(8.64,38.555) 8.64,38.245 7.69,37.295 7.69,33.956 10.346,31.3 12.22,31.3 13.426,30.094 U201.28
PW_EN_Main: D103.2 TP216.1 U201.10 | length 33.1
  Top Layer w0.2: v1(42.25,22.54) 42.33,22.54 42.892,23.102 v1(42.892,26.776)
  Bottom Layer w0.2: U201.10 14.926,23.76 15.876,22.81 40.611,22.81 40.881,22.54 v1(42.25,22.54)
PW_EN_Sensor: TP214.1 U104.3 U201.12 | length 47.4
  Top Layer w0.2: v1(42.302,21.025) 44.61,23.333 44.61,29.93 v1(49.66,34.98)
  Bottom Layer w0.2: U201.12 13.926,23.354 15.27,22.01 40.28,22.01 41.265,21.025 v1(42.302,21.025)
RS485_A0: J1.2 R201.2 U202.6 | length 7.1
  Bottom Layer w0.2: J1.2 53.545,46.495 R201.2 53.545,44.755 54.52,43.78 55.86,43.78 56.45,43.19 U202.6
RS485_B0: J1.3 R201.1 U202.7 | length 6.5
  Bottom Layer w0.2: J1.3 55.037,47.457 55.037,44.922 R201.1 55.595,44.28 56.71,44.28 57.72,43.27 U202.7
SW0_BUT: R1.1 SW1.1 U201.20 | length 23.2
  Bottom Layer w0.2: SW1.1 10,15.13 9.236,15.894 9.236,25.307 10.558,26.63 U201.20
  other v1: 9.195,18.907
SW1_BUT: R2.1 SW2.1 U201.19 | length 33.2
  Bottom Layer w0.2: U201.19@11.239,26.128 10.695,26.128 9.663,25.095 9.663,20.067 11.86,17.87 11.86,15.65 16.42,11.09 22.243,11.09 SW2.1
  Bottom Layer w0.254: U201.19@11.239,26.128 U201.19
  other v1: 10.78,18.907
SW2_BUT: R3.1 SW3.1 U201.18 | length 49.8
  Bottom Layer w0.2: U201.18 11.216,25.605 10.776,25.605 10.09,24.918 10.09,21.31 10.407,20.993 11.32,20.993 11.611,20.702 11.611,19.609 12.339,18.881 14.34,16.88 14.34,15.5 16.63,13.21 38.457,13.21 SW3.1
  other v1: 12.365,18.907
SW3_BUT: Q1.3 TP212.1 U201.14 | length 28.5
  Top Layer w0.254: v1(34.1,21.23) 34.7,21.83 v1(34.7,25.826)
  Bottom Layer w0.254: U201.14@12.928,24.443 U201.14 12.926,22.424 14.11,21.24 v1@34.1,21.24
SYS_JTCK-SWCLK: TP209.1 U201.24 | length 11.3
  Bottom Layer w0.2: TP209.1 4.47,34.88 10.711,28.639 11.231,28.639 U201.24
SYS_JTDI: TP211.1 U201.25 | length 12.8
  Bottom Layer w0.2: TP211.1 10.605,29.315 U201.25
SYS_JTDO-SWO: TP213.1 U201.26 | length 15.7
  Bottom Layer w0.2: TP213.1 3.51,38.95 3.51,37.004 10.204,30.31 10.794,30.31 11.87,30.31 12.401,29.779 12.401,29.34 U201.26
SYS_JTMS-SWDIO: TP208.1 U201.23 | length 10.5
  Bottom Layer w0.2: TP208.1 6.42,32.34 10.63,28.13 U201.23
SYS_NJTRST: TP215.1 U201.27 | length 18.6
  Bottom Layer w0.2: TP215.1 3.91,41.09 3.91,37.17 10.37,30.71 12.244,30.71 12.926,30.028 U201.27
USART2_DE: TP203.1 U201.7 U202.2 U202.3 | length 56.7
  Bottom Layer w0.2: U201.7 16.996,25.63 18.616,24.01 48.899,24.01 55.14,30.251 55.95,31.061 55.95,35.32 54.605,36.665 54.605,38.182 54.942,38.519 55.875,38.519 56.45,37.944 U202.3
  Bottom Layer w0.556: U202.3 56.453,37.591 56.453,36.859 v1(56.946,36.367) 57.72,37.141 U202.2
USART2_RXD: TP205.1 U201.9 U202.1 | length 52.7
  Bottom Layer w0.2: U201.9 16.824,24.445 18.059,23.21 49.23,23.21 56.75,30.73 56.75,35.354 v1(58.99,37.594)
USART2_TXD: TP204.1 U201.8 U202.4 | length 51.1
  Bottom Layer w0.2: U201.8 16.136,25.105 16.955,25.105 18.45,23.61 49.064,23.61 56.07,30.616 56.35,30.896 56.35,35.486 56.07,35.766 55.18,36.655 v1(55.18,37.594)
USB_DM: J2.2 U201.21 | length 5
  Bottom Layer w0.2: J2.2 8.236,24.99 10.375,27.13 U201.21
USB_DP: J2.3 U201.22 | length 5
  Bottom Layer w0.2: J2.3 8.32,25.64 10.31,27.63 U201.22
VDDA: C204.1 R203.2 U201.5 | length 3.7
  Bottom Layer w0.2: U201.5 C204.1 R203.2
pads on no net: FID1. FID2. J2.4 U101.4 U201.2 U201.3 U201.6 U203.6 U203.7 U203.8 U204.6 U204.7 U204.8 U204.13 U204.14 U204.15 U204.16 U204.17

## Polygon pours and split planes (outlines as drawn)
DGND on Top Layer "DGND" (solid, pour order 2): 80,50 80,0 0,0 0,50
DGND on Bottom Layer "DGND" (solid, pour order 3): 0,0 0,50 80,50 80,0

## Keep-outs
Keep-Out Layer:
  the board outline again, w0.254

## Silkscreen, mask and mechanical layers (free items; w line width, h text height)
Top Overlay:
  drawing of 10 lines, arcs and shapes, not listed
  text "PN :" at 69.873,12.964 h0.9
  text ".PCB_PN" at 72.883,12.95 h0.9
  text "RV :" at 69.901,11.694 h0.9
  text ".PCB_Rev" at 72.864,11.604 h0.9
  text "MO :" at 69.915,10.273 h0.9
  text ".PCB_Name" at 72.938,10.273 h0.9
  text "Universal Utilities" at 48.69,9.962 h5.56
  text "GROUP" at 55.295,8.054 h3.8
Mechanical 1:
  lines w0.254: 0,0 10,0 10,5 ; 70,5 70,0 80,0